# Altium PCB efr_32_vna.PcbDoc
Units mm, origin at the board's own origin, x right, y up, seen from the top; angles counter-clockwise.
Board outline 49.91 x 49.91 mm, 2 copper layers (Top Layer, Bottom Layer); 24 components, 21 nets, 76 pads, 0 vias.
Unrouted connection lines stored in the file: 53.
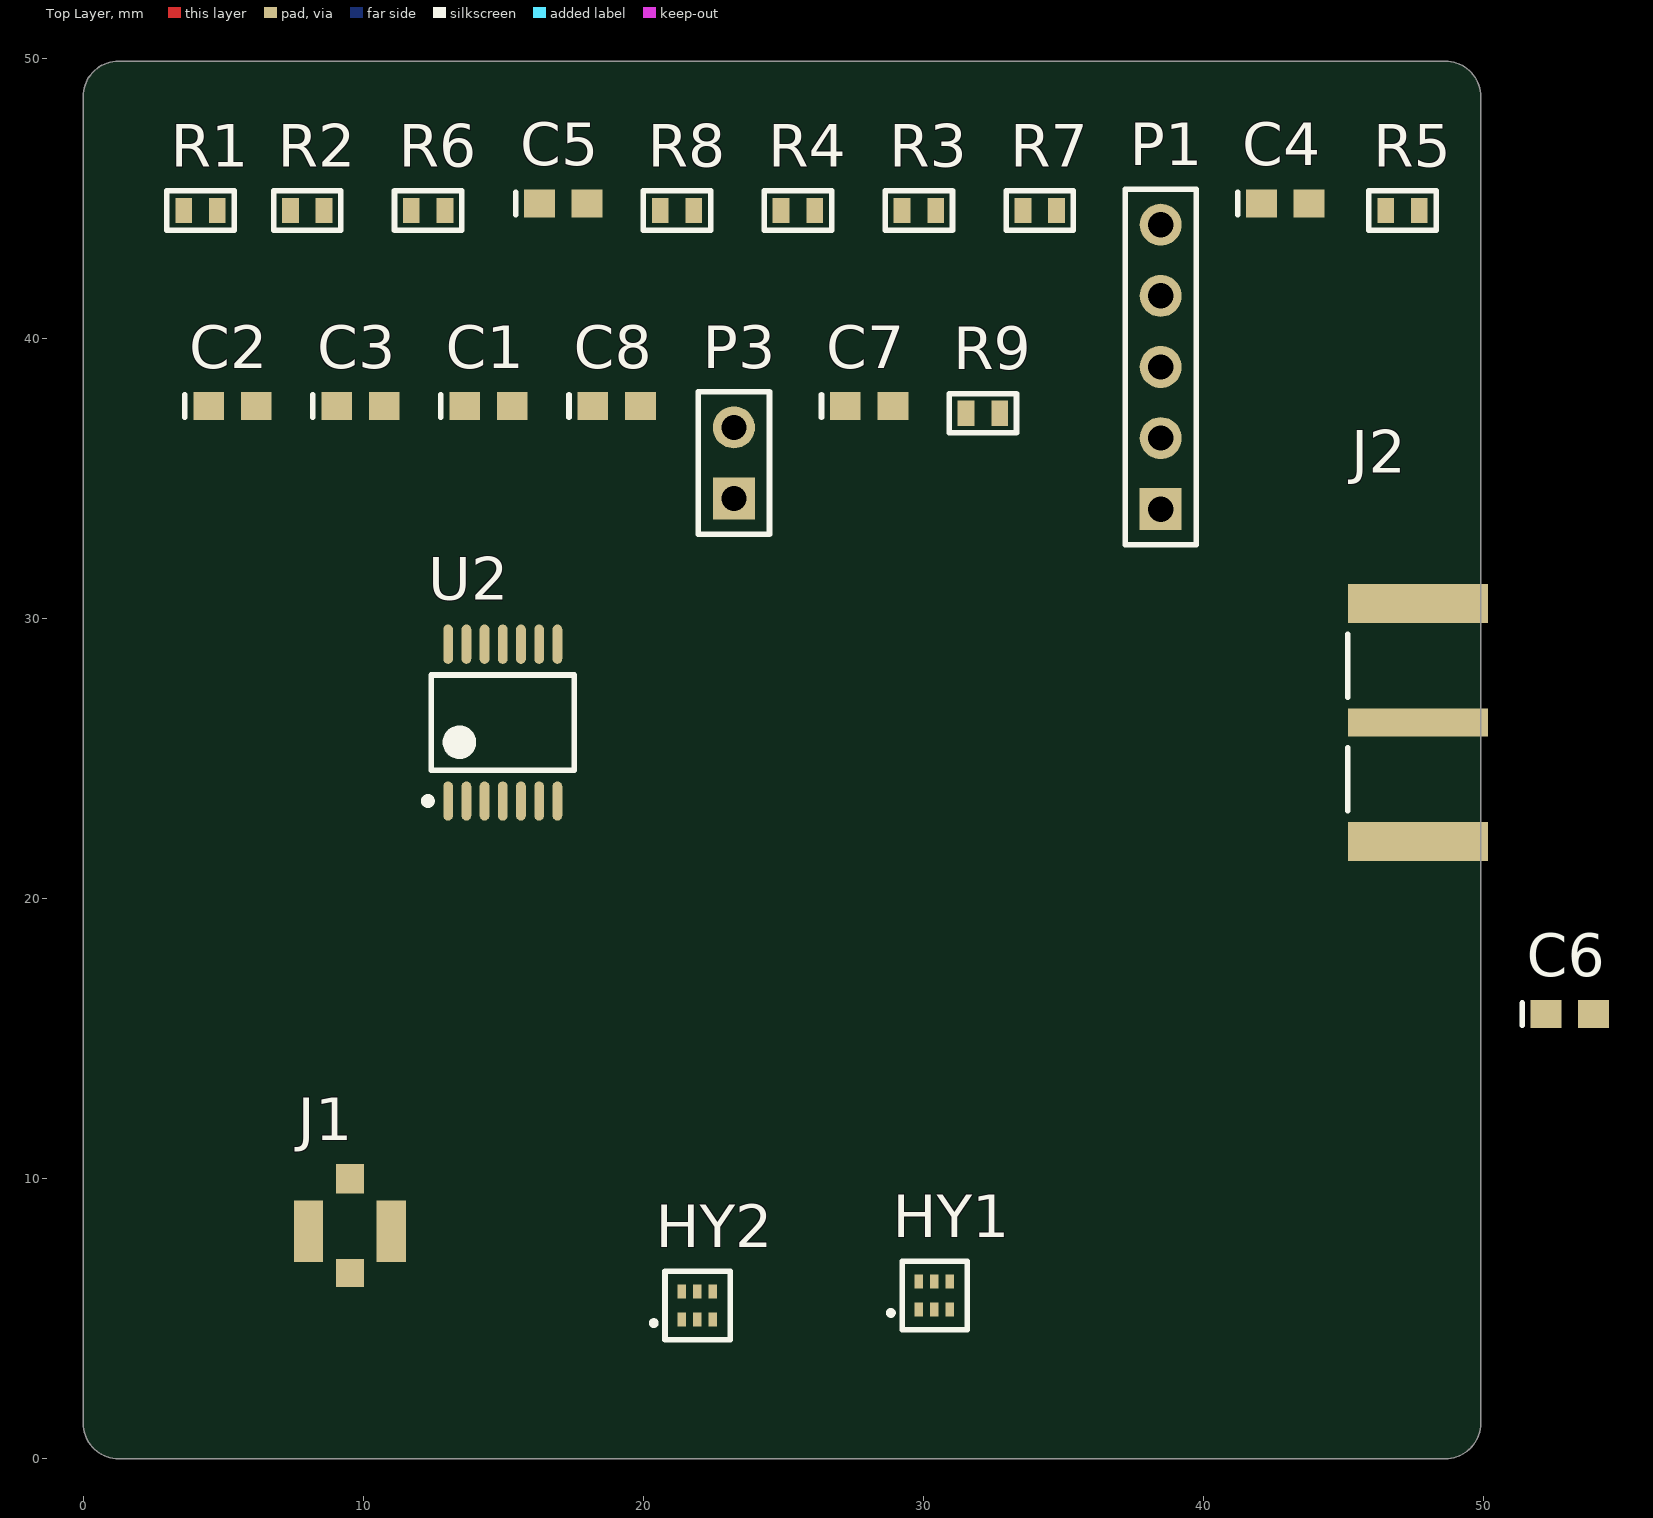
[diagram p0: Top Layer view]
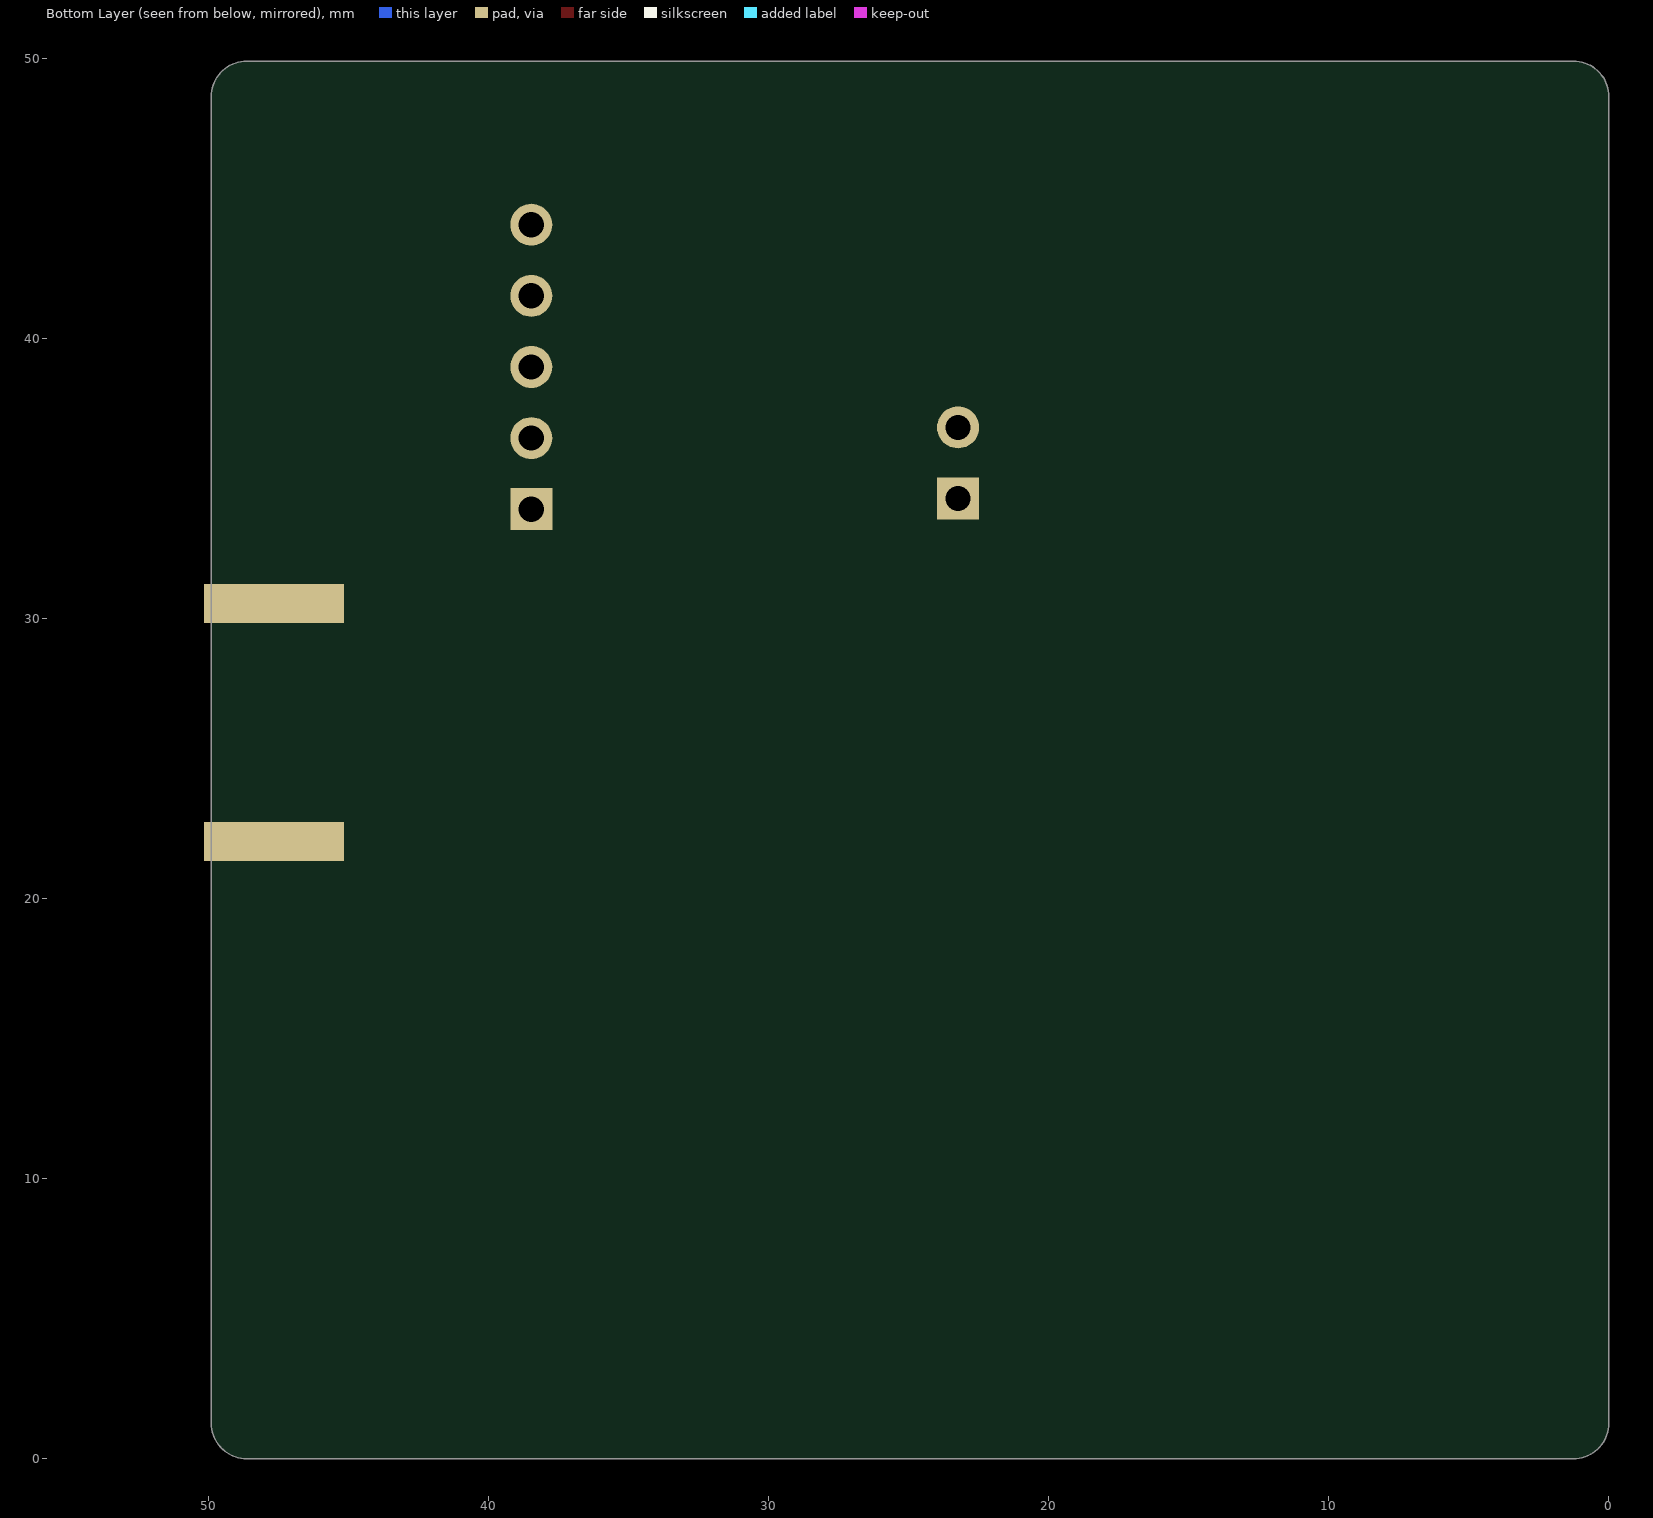
[diagram p1: Bottom Layer view, seen from below]

## Layer stack, top to bottom
Top Solder: solder mask 0.0102, Solder Resist, Dk 3.5
Top Layer: signal copper 0.0356
Dielectric 1: dielectric 0.32, FR-4, Dk 4.8
Bottom Layer: signal copper 0.0356
Bottom Solder: solder mask 0.0102, Solder Resist, Dk 3.5

## Board outline
0,1.27 0,48.641 cw(c1.27,48.641) 1.27,49.911 48.641,49.911 cw(c48.641,48.641) 49.911,48.641 49.911,1.27 cw(c48.641,1.27) 48.641,0 1.27,0 cw(c1.27,1.27)

## Design rules (kind name [scope] priority, off if disabled: settings)
Clearance [All] p1: gap=0.254 ignorepadtopadclearanceinfootprint=FALSE except(0: Arc-Hole Track-Hole SMDPad-Hole THPad-Hole Via-Hole Fill-Hole Poly-Hole Region-Hole Text-Hole)
PolygonConnect [All] p1: connectstyle=Relief reliefconductorwidth=0.254 reliefentries=4 polygonreliefangle="90 Angle" airgapwidth=0.254
RoutingVias [All] p1: holewidth=0.711 width=1.27 viastyle="Through Hole" minholewidth=0.711 minwidth=1.27 maxholewidth=0.711 maxwidth=1.27
SolderMaskExpansion [All] p1: expansion=0.102
Width [All] p1: maxlimit=0.254 minlimit=0.254 preferedwidth=0.254
30 further rules are at their usual default settings.

## Components (designator, comment, footprint, x,y, rotation, side; value= is the part's Value field where it differs from the comment)
C1 "C0603" 0603 14.478,37.592 r0 top value=100pF
C2 "C0603" 0603 5.334,37.592 r0 top value=100pF
C3 "C0603" 0603 9.906,37.592 r0 top value=1000pF
C4 "C0603" 0603 42.926,44.831 r0 top value=1000pF
C5 "C0603" 0603 17.145,44.831 r0 top value=1000pF
C6 "C0603" 0603 53.086,15.875 r0 top value=1000pF
C7 "C0603" 0603 28.067,37.592 r0 top value=100nF
C8 "C0603" 0603 19.05,37.592 r0 top value=100pF
HY1 "Dir. cpl 0.7-2.7GHz" "1.6x0.8mm [EIA 0603]" 29.845,5.334 r0 top
HY2 "Dir. cpl 0.7-2.7GHz" "1.6x0.8mm [EIA 0603]" 21.379,4.969 r0 top
J1 "u.fl jack smd" "U.FL jack" 9.525,8.128 r90 top
J2 "32K145-400L5" ROS-32K145-400L5_V 50.165,26.289 r270 top
P1 "Header 5" HDR1X5 38.481,33.909 r90 top
P3 "Header 2" HDR1X2 23.241,34.29 r90 top
R1 "100R 0603 1%" R0603 4.191,44.577 r0 top value=100R
R2 "100R 0603 1%" R0603 8.001,44.577 r0 top value=100R
R3 "100R 0603 1%" R0603 29.845,44.577 r0 top value=100R
R4 "100R 0603 1%" R0603 25.527,44.577 r0 top value=100R
R5 "52.3R" R0603 47.117,44.577 r0 top value=100R
R6 "52.3R" R0603 12.319,44.577 r0 top value=100R
R7 "0R 0603 1%" R0603 34.163,44.577 r0 top value=0R
R8 "0R 0603 1%" R0603 21.209,44.577 r0 top value=0R
R9 "0R 0603 1%" R0603 32.131,37.338 r0 top value=0R
U2 "AD8302ARUZ" ADI-RU-14_L 14.986,26.289 r90 top

## Footprints (in the part's own frame and the unit in brackets; to place one, negate y for a bottom-side part, rotate by r counter-clockwise, add the part's x,y. Pads: shape width x height; smd on the part's side, far side on the other; paste and mask are expansions set on the pad)
"1.6x0.8mm [EIA 0603]" [mm] "HHM22106C1 case"
  rect 0.3x0.5 smd: 1(0,0) 2(0.55,0) 3(1.1,0) 4(1.1,1) 5(0.55,1) 6(0,1)
  silkscreen extent -1.05,-0.72 1.73,1.73, body extent -0.25,0.1 1.35,0.9, height 0.6
0603 [mm] "Chip Capacitor; Body 1.6 x 0.8 mm (LxW typ)"
  rect 1.1x1 smd: 1(-0.85,0) 2(0.85,0)
  silkscreen extent -1.7,-0.4 -1.7,0.4
ADI-RU-14_L [mm] "TSOP, 14-Leads, Body 5x4.4mm, Pitch 0.65mm, IPC High Density"
  oval 1.4x0.35 smd: 1(-2.8,1.95) 2(-2.8,1.3) 3(-2.8,0.65) 4(-2.8,0) 5(-2.8,-0.65) 6(-2.8,-1.3) 7(-2.8,-1.95) 8(2.8,-1.95) 9(2.8,-1.3) 10(2.8,-0.65) 11(2.8,0) 12(2.8,0.65) 13(2.8,1.3) 14(2.8,1.95)
  silkscreen extent -2.92,-2.55 1.7,2.8, body extent -2.25,-2.55 2.25,2.55, height 1.2
HDR1X2 [mm] "Connector; Header; 2 Position"
  rect 1.5x1.5 hole 0.9: 1(0,0)
  round 1.5 hole 0.9: 2(2.54,0)
  silkscreen extent -1.27,-1.27 3.81,1.27
HDR1X5 [mm] "Connector; Header; 5 Position"
  rect 1.5x1.5 hole 0.9: 1(0,0)
  round 1.5 hole 0.9: 2(2.54,0) 3(5.08,0) 4(7.62,0) 5(10.16,0)
  silkscreen extent -1.27,-1.27 11.43,1.27
R0603 [mm]
  rect 0.6x0.9 smd: 1(-0.6,0) 2(0.6,0)
  silkscreen extent -1.2,-0.7 1.2,0.7
ROS-32K145-400L5_V [mm] "SMA Right Angle Jack, Edge Mount, 14.25x9.5x4.46mm, Rosenberger Recommended"
  rect 1x5 smd: 1(0,-2.5)
  rect 1.4x5 smd: MP(-4.25,-2.5) MP(4.25,-2.5)
  rect 1.4x5 smd far side paste-2: ""(-4.25,-2.5) ""(4.25,-2.5)
  silkscreen extent -3.15,-5 3.15,-5, body extent -4.75,-4.75 4.75,9.5, height 4.46
"U.FL jack" [mm] "U.FL smd jack AMPhenol RF AMC series"
  rect 1.05x1 smd: 1(1.875,0)
  rect 1x1 smd: 2(-1.5,0)
  rect 2.2x1.05 smd: 2(0,1.475) 2(0,-1.475)
  body extent -1.5,-1.5 1.6,1.5, height 1.25

## Part data
C1 C2 C3 C4 C5 C6 C7 C8: "Ceramic Chip Capacitor - Standard", PackageDocument=Mar-2001, Code_IPC="1608 [0603]", Code_JEITA=0603, ComponentLink1Description="Manufacturer Link", ComponentLink1URL=http://www.kemet.com/, ComponentLink2Description=Datasheet, ComponentLink2URL=http://www.kemet.com/kemet/web/homepage/kechome.nsf/vapubfilesname/F3102TA.pdf/$file/F3102TA.pdf, DatasheetDocument=Mar-2001, LatestRevisionDate=19-Mar-2004, LatestRevisionNote="Silkscreen size reduced.", Note="Footprint corresponds to dimensions for bulk cassette packaging. This case size has tightened tolerances.", PackageReference=0603, Published=17-Jul-2002, Publisher="Altium Limited"
HY1 HY2: library part HHM22106C1, "0.7-2.7GHz 28.5dB directional coupler", Case/Package=0603, Case Code (Metric)=1608, Frequency=700MHz, Manufacturer 1=TDK, Max Operating Temperature=85°C, Min Operating Temperature=-40°C, Package Quantity=4000, Supplier Part Number 1=810-HHM22106C1, Case Code (Imperial)=0603, ComponentLink1Description=//media.digikey.com/pdf/Data%20Sheets/TDK%20PDFs/HHM22106C1.pdf, ComponentLink1URL=//media.digikey.com/pdf/Data%20Sheets/TDK%20PDFs/HHM22106C1.pdf, ComponentLink2Description=https://product.tdk.com/info/en/documents/data_sheet/rf_coupler_hhm2910e4_en.pdf, ComponentLink2URL=https://product.tdk.com/info/en/documents/data_sheet/rf_coupler_hhm2910e4_en.pdf, Insertion Loss=0.2dB, Manufacturer Part Number 1=HHM22106C1, Packaging="Tape and Reel", Pricing 1="1=0.43, 10=0.336, 50=0.336, 100=0.191, 1000=0.118, 10000=0.092 (USD)", Stock 1=2964, Supplier 1=Mouser, Termination=SMD/SMT, Weight=7.1E-05oz
J1: library part "u.fl connector, jack A-1JB", Frequency Max=6GHz, Manufacturer 1="Amphenol / Amphenol RF", Manufacturer Part Number 1=A-1JB, Supplier Part Number 1=523-A-1JB, Body Style="Straight Jack", Coaxial Termination=Solder, ComponentLink1Description=https://datasheet.ciiva.com/22652/689597-22652949.pdf, ComponentLink1URL=https://datasheet.ciiva.com/22652/689597-22652949.pdf, ComponentLink2Description=https://datasheet.ciiva.com/15172/getdatasheetpartid-168895-15172647.pdf, ComponentLink2URL=https://datasheet.ciiva.com/15172/getdatasheetpartid-168895-15172647.pdf, ComponentLink3Description=https://datasheet.ciiva.com/36526/2036357-36526267.pdf, ComponentLink3URL=https://datasheet.ciiva.com/36526/2036357-36526267.pdf, ComponentLink4Description=https://datasheet.ciiva.com/5175/ca-1jb-38743-5175829.pdf, ComponentLink4URL=https://datasheet.ciiva.com/5175/ca-1jb-38743-5175829.pdf, ComponentLink5Description=https://datasheet.ciiva.com/3132/ca-1jb-3132240.pdf, ComponentLink5URL=https://datasheet.ciiva.com/3132/ca-1jb-3132240.pdf, ComponentLink6Description=https://datasheet.ciiva.com/14157/04614608-14157589.pdf, ComponentLink6URL=https://datasheet.ciiva.com/14157/04614608-14157589.pdf, ComponentLink7Description=https://datasheet.ciiva.com/643/ca-1jb-643532.pdf, ComponentLink7URL=https://datasheet.ciiva.com/643/ca-1jb-643532.pdf, ComponentLink8Description=https://datasheet.ciiva.com/14565/70142555-14565783.pdf, ComponentLink8URL=https://datasheet.ciiva.com/14565/70142555-14565783.pdf, ComponentLink9Description=https://datasheet.ciiva.com/643/ca-1jb-643531.pdf, ComponentLink9URL=https://datasheet.ciiva.com/643/ca-1jb-643531.pdf, Connector Type="AMC Coaxial", Contact Material=Brass, Contact Plating=Gold, Impedance=50ohm, Pricing 1="1=0.65, 10=0.596, 50=0.535, 100=0.51, 1000=0.365, 10000=0.351 (USD)", Stock 1=19506, Supplier 1=Mouser
J2: "SMA Right Angle Jack, Edge Mount, Up to 18 GHz, -55 to 155 degC", ComponentLink1Description="Manufacturer URL", ComponentLink1URL=http://www.rosenberger.de, ComponentLink2Description=Datasheet, ComponentLink2URL=http://rosenberger.de/ok/images/documents/db/32K145-400L5.pdf, ComponentLink3Description="Package Specification", ComponentLink3URL=http://rosenberger.de/ok/images/documents/db/32K145-400L5.pdf, ComponentLink4Description="Series Overview / Design Note", ComponentLink4URL=http://rosenberger.de/ok/images/documents/spez/32.pdf, ComponentLink5Description="Webshop / RFQ", ComponentLink5URL=http://www.rosenberger.com/en/contact/sales/, DatasheetVersion=b00, Desgin Note 2="For more information about DRC setting, please look at following webpage, http://techdocs.altium.com/display/SCRT/Design+Rule+for+Edge-Mount+Connectors", Design Note 1="Footprint in library is a generic example - only application specific footprint delivers High Performance", Mounting Technology="Surface Mount", PackageDescription="SMA Right Angle Jack, Edge Mount, 14.25 x 9.5 x 4.46 mm", PackageReference=32K145-400L5, PackageVersion=b00, PartNumber=32K145-400L5
P1: "Header, 5-Pin", LatestRevisionDate=17-Jul-2002, LatestRevisionNote="Re-released for DXP Platform.", Publisher="Altium Limited"
P3: "Header, 2-Pin", LatestRevisionDate=17-Jul-2002, LatestRevisionNote="Re-released for DXP Platform.", Publisher="Altium Limited"
R1 R2 R3 R4: library part "100R 0603", Case=0603, Tolerance=1%, Publisher=iv
R5 R6: library part "100R 0603", "100R 0603 1%", Case=0603, Tolerance=1%, Publisher=iv
R7 R8 R9: library part "0R 0603", Case=0603, Tolerance=1%, Publisher=iv
U2: library part CMP-0284-00076-1, "LF-2.7 GHz RF/IF Gain and Phase Detector, 60ns Response Time, RU-14, Pb-Free, 96 Tube", RF Frequency (MHz)=2700, Supply Current=19mA, Temp Stability (dB)=1dB, Voltage Supply (V)="2.7 to 5.5", Code_JEDEC=MO-153AB-1, ComponentLink1Description="Manufacturer URL", ComponentLink1URL=www.analog.com, ComponentLink2Description=Datasheet, ComponentLink2URL=http://www.analog.com/static/imported-files/data_sheets/AD8302.pdf, ComponentLink3Description="Package Specification", ComponentLink3URL=http://www.analog.com/static/imported-files/packages/36057385283879153717235186773RU14.pdf, DatasheetVersion="Rev. A", Dynamic Range (dB)=60dB, PackageDescription="14-Lead Thin Shrink Small Outline Package [TSSOP]", PackageReference=RU-14, PackageVersion=Aug-2002, Product Description="Dual-Channel Gain and Phase Outputs", Response Time (ns typ)=60ns

## Nets (pads, with @x,y where several pads share a name; then routed paths per layer and width w, separated by ;. In a path a pad name is that pad's centre, name@x,y a point inside that pad or via, vN(x,y) a via of type N, cw(c..) or ccw(c..) an arc to the next point about the centre after c; other vN are vias at no path point)
GND: C1.2 C2.1 C4.2 C5.2 C7.2 C8.2 HY1.2 HY1.5 HY2.2 HY2.5 J1.2 J2.MP P1.3 P1.5 P3.1 R1.1 R2.1 R3.1 R4.1 R5.2 R6.1 U2.1 U2.7
MAG: P1.2 R7.1
NetC1_1: C1.1 U2.14
NetC2_2: C2.2 U2.8
NetC3_1: C3.1 U2.5
NetC3_2: C3.2 HY1.6 R5.1
NetC4_1: C4.1 U2.6
NetC5_1: C5.1 U2.3
NetC6_1: C6.1 U2.2
NetC6_2: C6.2 HY2.6 R6.2
NetC7_1: C7.1 C8.1 R9.1 U2.4
NetHY1_1: HY1.1 J1.1
NetHY1_3: HY1.3 HY2.3
NetHY1_4: HY1.4 R3.2 R4.2
NetHY2_1: HY2.1 J2.1
NetHY2_4: HY2.4 R1.2 R2.2
NetP3_2: P3.2 U2.11
NetR7_2: R7.2 U2.12 U2.13
NetR8_2: R8.2 U2.9 U2.10
PHASE: P1.4 R8.1
VCC: P1.1 R9.2
pads on no net: J2.

## Silkscreen, mask and mechanical layers (free items; w line width, h text height)
Mechanical 1:
  lines w0.5: 0,1.27 ccw(c1.27,1.27) 1.27,0 48.641,0 ccw(c48.641,1.27) 49.911,1.27 49.911,48.641 ccw(c48.641,48.641) 48.641,49.911 1.27,49.911 ccw(c1.27,48.641) 0,48.641 0,6.35 0,1.27

## Text inside footprints (layer, text, board x,y; h text height)
J2: Mechanical 3 "Board Edge" at 50.165,34.389 h0.2 r270